# Altium PCB PCB1.PcbDoc
Units mm, origin at the board's own origin, x right, y up, seen from the top; angles counter-clockwise.
Board outline 181.36 x 62.1 mm, 2 copper layers (Top Layer, Bottom Layer); 31 components, 21 nets, 74 pads, 5 vias.
Unrouted connection lines stored in the file: 1.
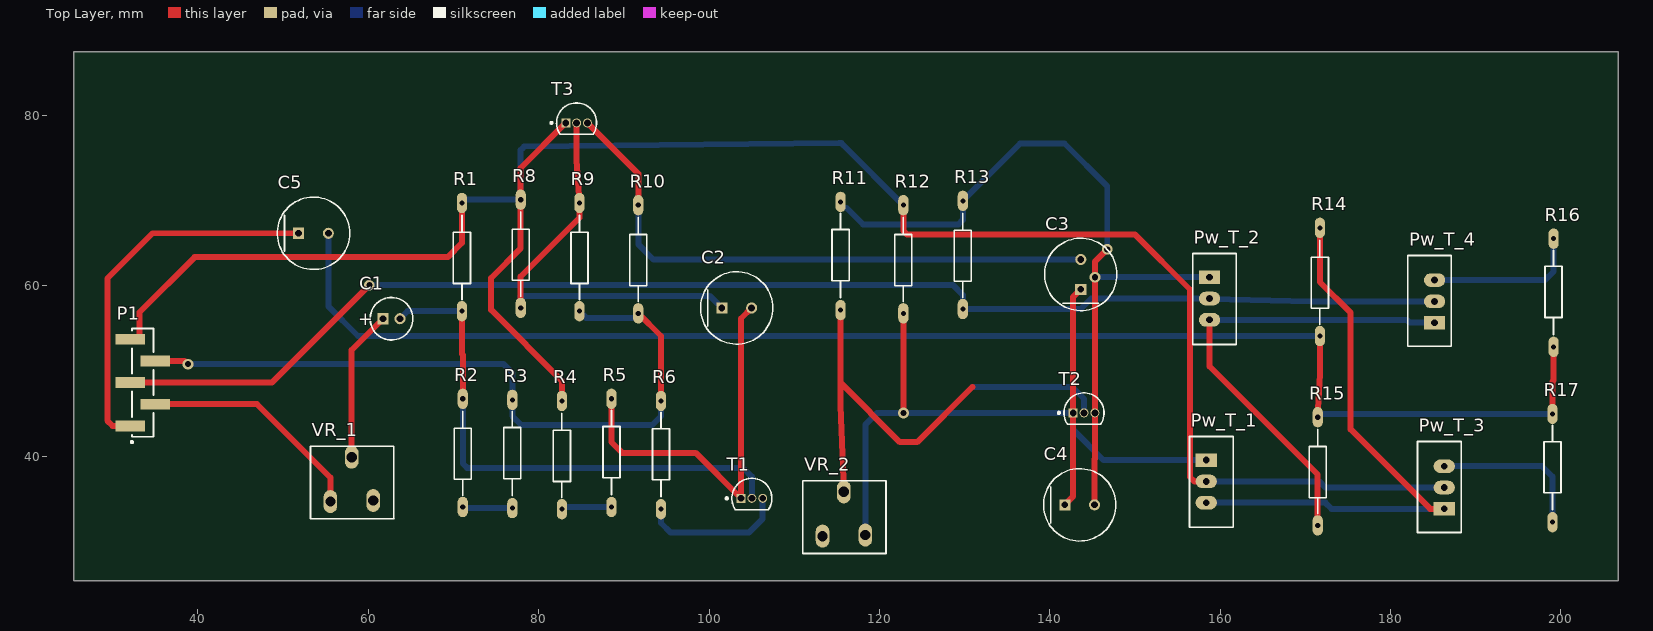
[diagram p0: Top Layer view]
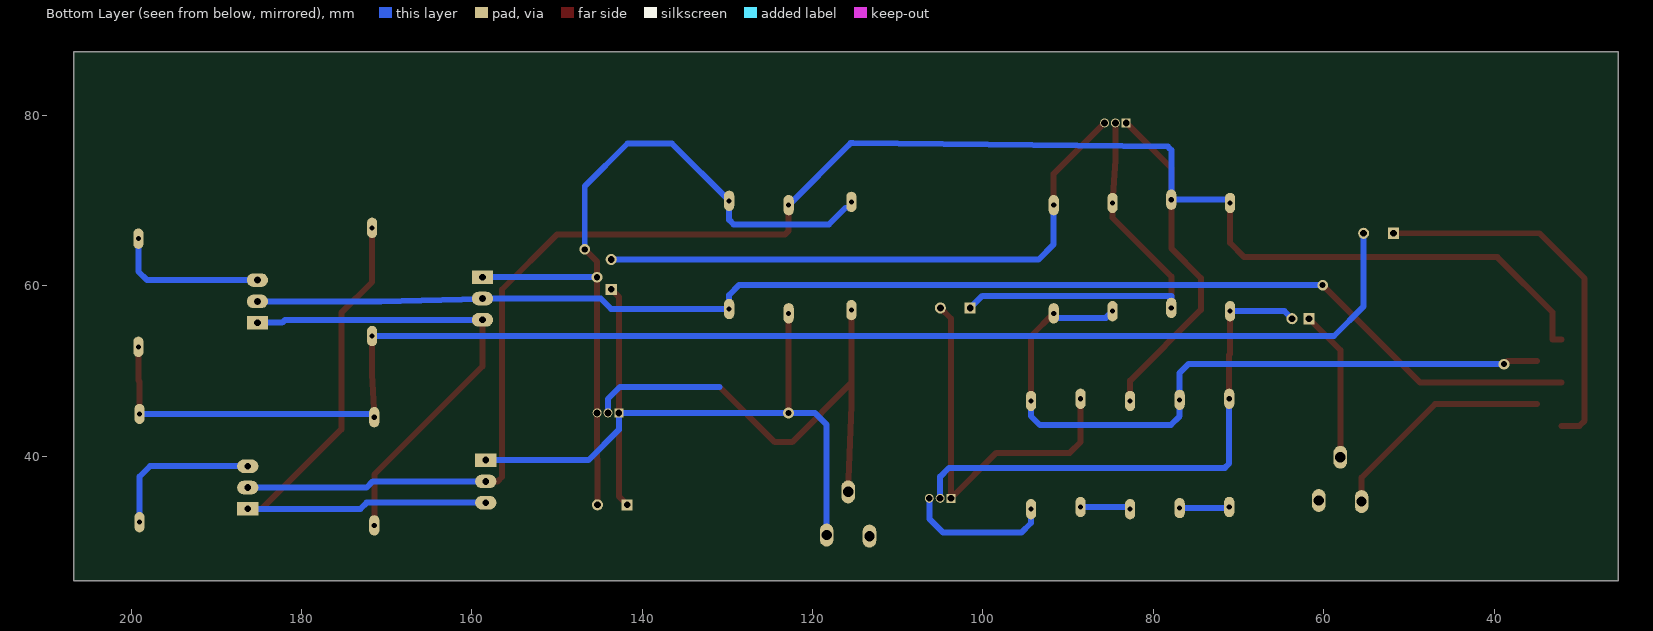
[diagram p1: Bottom Layer view, seen from below]
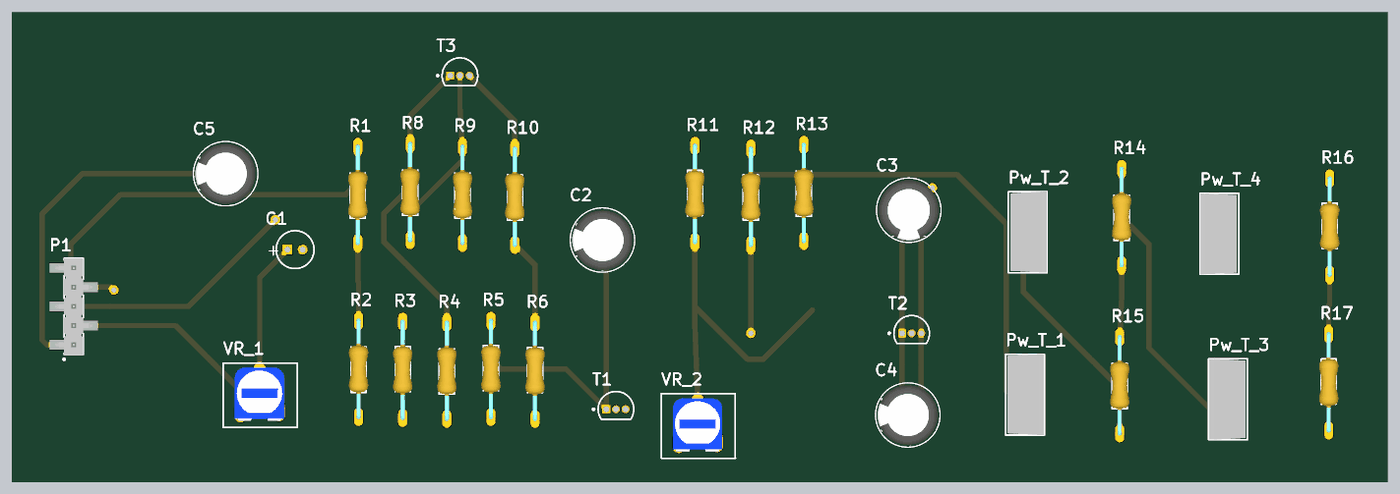
[diagram p2: 3D render of the assembled board from above, using the file's embedded part models]

## Layer stack, top to bottom
Top Solder: solder mask 0.0102, Solder Resist, Dk 3.5
Top Layer: signal copper 0.0356
Dielectric 1: dielectric 0.32, FR-4, Dk 4.8
Bottom Layer: signal copper 0.0356
Bottom Solder: solder mask 0.0102, Solder Resist, Dk 3.5

## Board outline
25.4,25.4 206.756,25.4 206.756,87.503 25.4,87.503

## Design rules (kind name [scope] priority, off if disabled: settings)
Clearance [All] p1: gap=0.254 ignorepadtopadclearanceinfootprint=FALSE
PolygonConnect [All] p1: connectstyle=Relief reliefconductorwidth=0.254 reliefentries=4 polygonreliefangle="90 Angle" airgapwidth=0.254
RoomDefinition sheet1 [InComponentClass('sheet1')] p1: confinementstyle=ConfineIn formatcopy=TRUE lockcomponents=FALSE outline 233.68,24.765 418.973,24.765 418.973,70.104 233.68,70.104
RoutingVias [All] p1: holewidth=0.711 width=1.27 viastyle="Through Hole" minholewidth=0.711 minwidth=1.27 maxholewidth=0.711 maxwidth=1.27
SolderMaskExpansion [All] p1: expansion=0.102 istentingtop=FALSE
Width [All] p1: maxlimit=0.8 minlimit=0.254 preferedwidth=0.7 minimp=50.000000 maximp=50.000000 favimp=50.000000
30 further rules are at their usual default settings.

## Components (designator, comment, footprint, x,y, rotation, side; value= is the part's Value field where it differs from the comment)
C1 "4.7uF" CAPPR55-200-1100X500X1200 62.722,56.134 r0 top
C2 "100uF" FP-EEU-FR1H101B-MFG 103.251,57.404 r0 top
C3 "100uF" FP-EEU-FR1H101B-MFG 143.637,61.341 r90 top
C4 "100uF" FP-EEU-FR1H101B-MFG 143.51,34.29 r0 top
C5 "100uF" FP-EEU-FR1H101B-MFG 53.566,66.167 r0 top
P1 "TSM-105-01-T-SV" SMTC-TSM-105-01-X-SV 33.528,48.641 r90 top
Pw_T_1 "TIP 31" "TIP 31" 158.369,39.544 r0 top
Pw_T_2 "TIP 32" "TIP 31" 158.75,61.007 r0 top
Pw_T_3 "TIP 31" "TIP 31" 186.309,33.822 r180 top
Pw_T_4 "TIP 32" "TIP 31" 185.166,55.666 r180 top
R1 "" Res 70.993,63.373 r90 top value=10k
R2 "" Res 71.095,40.386 r90 top value=1k
R3 "" Res 76.911,40.259 r270 top value=1k
R4 "Res" Res 82.728,40.132 r90 top value=120
R5 "Res" Res 88.544,40.386 r270 top value=120
R6 "Res" Res 94.361,40.132 r270 top value=68
R8 "Res" Res 77.893,63.754 r90 top value=5.6k
R9 "Res" Res 84.794,63.373 r90 top value=6.8k
R10 "Res" Res 91.694,63.119 r90 top value=4.7k
R11 "" Res 115.443,63.5 r270 top value=1k
R12 "" Res 122.809,63.119 r90 top value=300
R13 "" Res 129.794,63.627 r90 top value=300
R14 "" Res 171.704,60.452 r90 top value=5.6k
R15 "" Res 171.45,38.227 r90 top value=5.6k
R16 "" Res 199.136,59.182 r270 top value=3.9
R17 "" Res 199.009,38.608 r270 top value=3.9
T1 "BC547BG" ONSC-TO-92-3-29-11 105.029,35.052 r0 top
T2 "BC547BG" ONSC-TO-92-3-29-11 144.018,45.085 r0 top
T3 "BC547BG" ONSC-TO-92-3-29-11 84.455,79.121 r0 top
VR_1 "VRes" VerRes 54.279,37.023 r0 top value=1k
VR_2 "VRes" VerRes 112.049,32.964 r0 top value=10k

## Footprints (in the part's own frame and the unit in brackets; to place one, negate y for a bottom-side part, rotate by r counter-clockwise, add the part's x,y. Pads: shape width x height; smd on the part's side, far side on the other; paste and mask are expansions set on the pad)
CAPPR55-200-1100X500X1200 [mm] "THD, 2-Leads, Dia 5mm, Body Length 11mm"
  rect 1.3x1.3 hole 0.8: 1(-1,0)
  round 1.3 hole 0.8: 2(1,0)
  silkscreen extent -2.5,-2.5 2.5,2.5, body extent -2.5,-2.5 2.5,2.5, height 12
FP-EEU-FR1H101B-MFG [mm]
  rect 1.3x1.3 hole 0.8 paste-1000 mask+0: 1(-1.75,0)
  round 1.3 hole 0.8 paste-1000 mask+0: 2(1.75,0)
  silkscreen extent -4.25,-4.25 4.25,4.25, body extent -4.35,-4.35 4.35,4.35, height 0.25
ONSC-TO-92-3-29-11 [mm] "TO, 3-Leads, Body Dia 4.7mm, Pitch 1.27mm"
  rect 1.05x1.05 hole 0.8: 1(-1.27,0)
  round 1.05 hole 0.8: 2(0,0) 3(1.27,0)
  silkscreen extent -3.07,-1.34 2.35,2.35, body extent -2.35,-1.33 2.36,2.36, height 7.87
Res [mm]
  oval 2.388x1.2 hole 0.6: 1(-6.35,0) 2(6.35,0)
  silkscreen extent -5,-1 4.9,1, body extent -6.63,-1.27 6.63,1.27, height 2.79
SMTC-TSM-105-01-X-SV [mm] "Single Row SMT Assembly, 5 Pins, Vertical, 2.54mm Pitch, Male"
  rect 1.27x3.43 smd: 1(-5.08,1.46) 2(-2.54,-1.46) 3(0,1.46) 4(2.54,-1.46) 5(5.08,1.46)
  silkscreen extent -7.11,-1.27 6.35,1.4, body extent -6.35,-2.45 6.35,2.45, height 9.65
"TIP 31" [mm]
  rect 2.5x1.6 / inner rect 2.5x16 / far side rect 2.5x1.6 hole 0.8: 1(0,0)
  oval 2.5x1.6 / inner oval 2.5x16 / far side oval 2.5x1.6 hole 0.8: 2(0,-2.5) 3(0,-5)
  silkscreen extent -1.98,-7.9 3.15,2.77, body extent -1.73,-7.88 3.1,2.78, height 22.62
VerRes [mm]
  oval 1.6x2.692 hole 1.2: 1(1.275,-2.35) 2(3.775,2.85) 3(6.3,-2.225)
  silkscreen extent -1.05,-4.38 8.75,4.15, body extent 0.5,-3.52 7,3.52, height 7.41

## Part data
C1: library part CMP-1665-00037-2, "Aluminum Electrolytic Capacitor, 4.7 uF, +/- 20%, 50 V, -40 to 85 degC, 2-Pin THD, RoHS, Bulk", Case/Package=Radial, Dielectric Material=Aluminium, Leakage Current=3uA, Manufacturer=Panasonic, Max Operating Temperature=85degC, Min Operating Temperature=-40degC, Package Description="2-Pin Radial Lead, Dia 5 mm, Height 12 mm", Package Quantity=200, Package Reference=CAPPR55-200-1100X500X1200, Ripple Current=45mA, Tolerance=20%, Voltage=50V, Capacitance=4.7uF, Datasheet URL=https://industrial.panasonic.com/cdbs/www-data/pdf/RDF0000/ABA0000C1218.pdf, Datasheet Version="Rev. 05, 10/2016", Diameter=5mm, Dissipation Factor=0.12%, Height=11mm, Height - Seated (Max)=0.472inch, Lead Diameter=0.5mm, Lead Free=LeadFree, Lead Pitch=2mm, Lead/Base Style=Straight, Length=11mm, Life (Hours)=2000Hour, Manufacturer URL=http://www.panasonic.com/, Mount=ThroughHole, Number of Pins=2, Packaging=Bulk, Radiation Hardening=No, REACH SVHC=NoSVHC, Ripple Current (AC)=45mA, RoHSCompliant=true, Termination=Radial, Voltage Rating=50V, Voltage Rating (DC)=50V, Width=0inch
C2 C3 C4 C5: library part CMP-05427-000020-1, "CAP ALUM 100UF 20% 50V RADIAL", Case/Package=Radial, ESR (Equivalent Series Resistance)=61mR, Max Operating Temperature=105°C, Min Operating Temperature=-40°C, Package Quantity=1, Ripple Current=870mA, Tolerance=20%, Voltage Rating=50V, Capacitance=100uF, Contact Plating=Tin, Diameter=8mm, Features="General Purpose", Height=11.5mm, Height - Seated (Max)=0.512inch, Impedance=61mR, Lead Diameter=0.6mm, Lead Free="Lead Free", Lead Pitch=5mm, Length=11.5mm, Life (Hours)=6000Hour, Mount="Through Hole", Packaging="Tape and Reel", Radiation Hardening=No, REACH SVHC="No SVHC", RoHS Compliant=Yes, Series=FR, Termination=Radial, Voltage Rating (DC)=50V
P1: library part CMP-1024-00239-1, "0.025\" SQ Post Header, Surface Mount, Vertical, -55 to 105 degC, 2.54 mm Pitch, 5-Pin, Male, RoHS", Manufacturer=Samtec, Temperature Range="-55 to 105 degC", ComponentLink1Description="Manufacturer URL", ComponentLink1URL=http://www.samtec.com, ComponentLink2Description=Datasheet, ComponentLink2URL=http://www.samtec.com/documents/webfiles/pdf/TSM.PDF, ComponentLink3Description="Package Specification", ComponentLink3URL=http://www.samtec.com/documents/webfiles/cpdf/TSM-1XX-XX-XXX-SV-XX-XXX-XX-MKT.pdf, DatasheetVersion=F-214, Mounting Technology="Surface Mount", Orientation=Vertical, PackageDescription="Single Row .100 SMT Assembly", PackageReference=TSM-105-01-X-SV, PackageVersion="BP, 8/2002", PartNumber=TSM-105-01-T-SV, Pitch="2.54 mm", RoHS=True
R1 R2 R3 R11 R12 R13 R14 R15 R16 R17: library part Res
T1 T2 T3: library part CMP-1048-01469-1, "Amplifier Transistor, NPN Silicon, 3-Pin TO-92, Pb-Free, Bulk Box", Manufacturer="On Semiconductor", ComponentLink1Description="Manufacturer URL", ComponentLink1URL=http://www.onsemi.com/, ComponentLink2Description=Datasheet, ComponentLink2URL=http://www.onsemi.com/pub_link/Collateral/BC546-D.PDF, ComponentLink3Description="Package Specification", ComponentLink3URL=http://www.onsemi.cn/pub_link/Collateral/2N6426-D.PDF, DatasheetVersion="Rev. 7", fT Min (MHz)=150, IC Continuous (A)=0.1, Mounting Technology="Through Hole", PackageDescription="3-Pin Transistor Outline, Body 4.825 x 3.685 mm, Pitch 1.27 mm", PackageReference=TO-92-3-29-11_AM_SL, PackageVersion="Rev. AM", Packing="Bulk Box", PartNumber=BC547BG, Polarity=NPN, RoHS=TRUE

## Via types
v1: diameter 1.27, hole 0.711, Top Layer to Bottom Layer, 5 vias

## Nets (pads, with @x,y where several pads share a name; then routed paths per layer and width w, separated by ;. In a path a pad name is that pad's centre, name@x,y a point inside that pad or via, vN(x,y) a via of type N, cw(c..) or ccw(c..) an arc to the next point about the centre after c; other vN are vias at no path point)
+12: P1.5 Pw_T_1.2 Pw_T_3.2 R1.2 R4.2 R8.2 R12.2 T3.1 | length 243
  Top Layer w0.7: P1.5 33.147,53.721 33.147,56.896 39.624,63.373 69.342,63.373 70.993,65.024 R1.2 ; R4.2 82.728,48.87 74.422,57.175 74.422,60.918 77.893,64.389 R8.2 77.893,73.829 T3.1 ; R12.2 122.809,66.45 123.219,66.04 149.987,66.04 156.464,59.563 156.464,37.552 156.972,37.044 Pw_T_1.2
  Bottom Layer w0.7: R1.2 70.993,70.104 R8.2 77.893,75.921 78.098,76.126 78.3,76.328 115.234,76.749 115.529,76.749 115.734,76.544 122.806,69.472 122.809,69.472 R12.2 ; Pw_T_1.2 171.617,37.044 172.339,36.322 Pw_T_3.2
GND: P1.4 R3.1 R6.1 R9.1 R10.1 | length 86.8
  Top Layer w0.7: P1.4 38.456,51.181 v1(38.837,50.8) ; R10.1 94.361,54.102 R6.1
  Bottom Layer w0.7: v1(38.837,50.8) 75.895,50.8 76.911,49.784 R3.1 76.911,44.704 77.953,43.663 93.32,43.663 94.361,44.704 R6.1 ; R9.1 85.58,56.237 91.694,56.237 R10.1
NetC1_1: C1.1 VR_1.2 | length 17.8
  Top Layer w0.7: VR_1.2 58.054,52.466 C1.1
NetC1_2: C1.2 R1.1 R2.2 T1.2 | length 62.7
  Top Layer w0.7: R1.1 70.993,51.994 71.095,51.892 R2.2
  Bottom Layer w0.7: C1.2 64.611,57.023 R1.1 ; R2.2 71.095,39.141 71.603,38.633 103.988,38.633 105.029,37.592 T1.2
NetC2_1: C2.1 R8.1 R9.2 T3.2 | length 50.2
  Top Layer w0.7: R8.1 77.893,61.087 84.794,67.987 R9.2 84.455,74.761 T3.2
  Bottom Layer w0.7: R8.1 77.893,58.826 100.079,58.826 C2.1
NetC2_2: C2.2 R5.1 T1.1 | length 45.9
  Top Layer w0.7: R5.1 88.544,41.656 89.814,40.386 98.425,40.386 T1.1 103.759,56.162 C2.2
NetC3_1: C3.1 C4.1 Pw_T_1.1 R12.1 T2.1 VR_2.3 | length 94.8
  Top Layer w0.7: v1(122.809,45.085) R12.1 ; C4.1 142.748,35.278 T2.1 142.748,58.702 C3.1
  Bottom Layer w0.7: VR_2.3 118.349,43.688 119.746,45.085 v1(122.809,45.085) T2.1 142.748,43.104 146.308,39.544 Pw_T_1.1
NetC3_2: C3.2 R10.2 T3.3 | length 69.4
  Top Layer w0.7: T3.3 91.694,73.152 R10.2
  Bottom Layer w0.7: R10.2 91.694,64.869 93.472,63.091 C3.2
NetC4_2: C4.2 Pw_T_2.1 R11.1 R13.2 T2.3 | length 91.5
  Top Layer w0.7: C4.2 145.26,39.649 145.288,39.677 T2.3 v1(145.288,61.007) 145.288,62.827 v1(146.742,64.281)
  Bottom Layer w0.7: R11.1 115.443,69.391 115.674,69.161 116.132,69.161 118.097,67.196 129.257,67.196 129.794,67.733 R13.2 136.525,76.708 141.732,76.708 146.742,71.698 v1(146.742,64.281) ; v1(145.288,61.007) Pw_T_2.1
NetC5_1: C5.1 P1.1 | length 44.3
  Top Layer w0.7: P1.1 29.972,43.561 29.366,44.167 29.366,60.862 34.671,66.167 C5.1
NetC5_2: C5.2 R14.1 R15.2 R16.2 R17.1 | length 171.8
  Top Layer w0.7: R15.2 171.704,49.606 R14.1 ; R17.1 199.009,48.768 199.136,48.895 R16.2
  Bottom Layer w0.7: C5.2 55.316,57.587 58.801,54.102 R14.1 ; R15.2 171.45,44.958 R17.1
NetP1_2: P1.2 VR_1.1 | length 27
  Top Layer w0.7: P1.2 46.943,46.101 55.554,37.49 VR_1.1
NetP1_3: P1.3 Pw_T_2.2 Pw_T_4.2 R13.1 | length 160.5
  Top Layer w0.7: P1.3 48.692,48.641 v1(60.122,60.071)
  Bottom Layer w0.7: v1(60.122,60.071) 128.651,60.071 129.794,58.928 R13.1 143.637,57.277 144.867,58.507 Pw_T_2.2 158.79,58.507 158.79,58.465 170.654,58.166 Pw_T_4.2
NetPw_T_1_3: Pw_T_1.3 Pw_T_3.1 R14.2 | length 68.2
  Top Layer w0.7: R14.2 171.704,60.452 175.311,56.845 175.311,43.155 184.643,33.822 Pw_T_3.1
  Bottom Layer w0.7: Pw_T_1.3 172.339,34.544 173.061,33.822 Pw_T_3.1
NetPw_T_2_3: Pw_T_2.3 Pw_T_4.1 R15.1 | length 55.9
  Top Layer w0.7: Pw_T_2.3 158.75,50.546 171.45,37.846 R15.1
  Bottom Layer w0.7: Pw_T_2.3 181.915,56.007 182.256,55.666 Pw_T_4.1
NetPw_T_3_3: Pw_T_3.3 R17.2 | length 18.5
  Bottom Layer w0.7: Pw_T_3.3 197.779,38.822 199.009,37.592 R17.2
NetPw_T_4_3: Pw_T_4.3 R16.1 | length 18.2
  Bottom Layer w0.7: Pw_T_4.3 198.12,60.666 199.136,61.682 R16.1
NetR2_1: R2.1 R3.2 | length 5.9
  Bottom Layer w0.7: R2.1 71.095,33.909 R3.2
NetR4_1: R4.1 R5.2 | length 6.1
  Bottom Layer w0.7: R4.1 82.728,34.036 R5.2
NetR6_2: R6.2 T1.3 | length 17.1
  Bottom Layer w0.7: R6.2 94.361,32.16 95.504,31.017 104.677,31.017 106.299,32.639 T1.3
NetR11_2: R11.2 T2.2 VR_2.2 | length 57.7
  Top Layer w0.7: R11.2 115.443,48.616 ; VR_2.2 115.443,45.974 115.443,48.616 ; 130.927,48.148 124.435,41.656 122.403,41.656 115.443,48.616
  Bottom Layer w0.7: 130.927,48.148 142.606,48.148 144.018,46.736 T2.2
pads on no net: VR_1.3 VR_2.1

## Text inside footprints (layer, text, board x,y; h text height)
C1: Top Overlay "+" at 58.814,55.397 h1.5